# Altium PCB mini-rocket.PcbDoc (part 1 of 2)
Units mil, origin at the board's own origin, x right, y up, seen from the top; angles counter-clockwise.
Board outline 4500 x 2250 mil, 4 copper layers (Top Layer, GND, PWR, Bottom Layer), stack 63.138 mil thick; 83 components, 60 nets, 294 pads, 72 vias.
Unrouted connection lines stored in the file: 32.
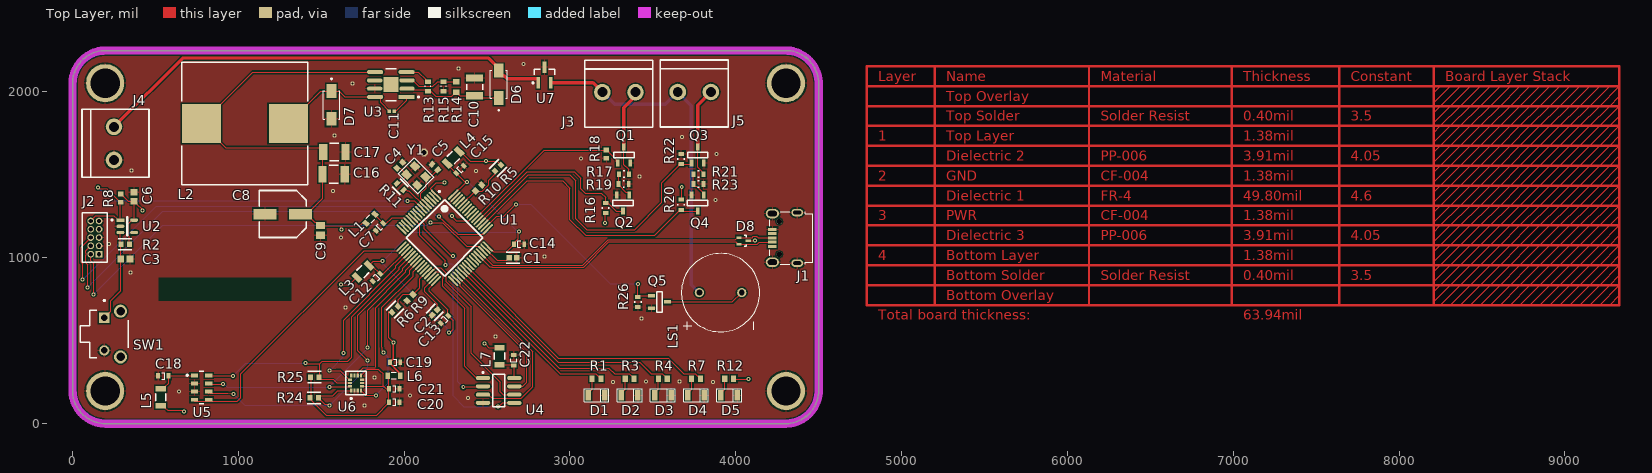
[diagram p0: Top Layer view]
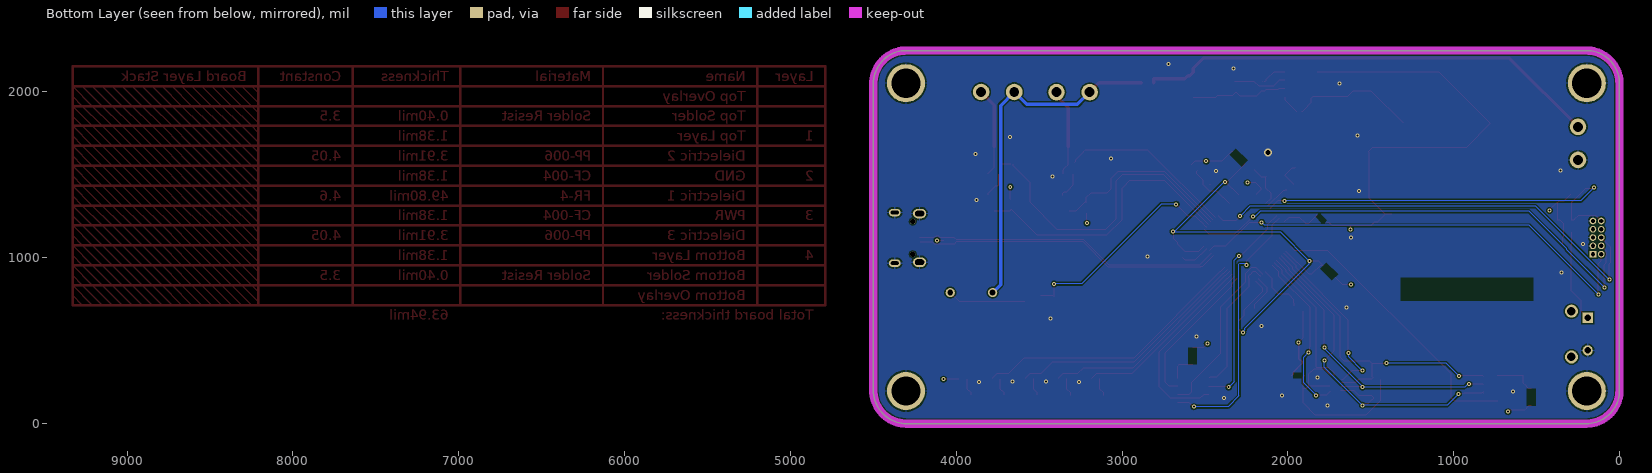
[diagram p1: Bottom Layer view, seen from below]
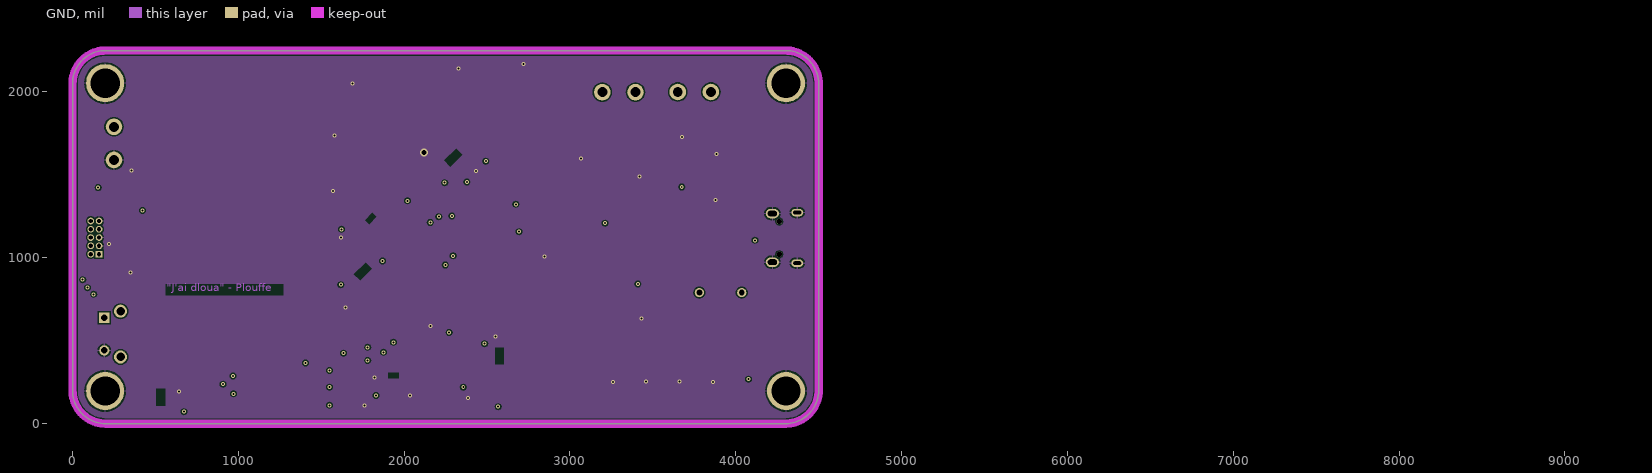
[diagram p2: GND]
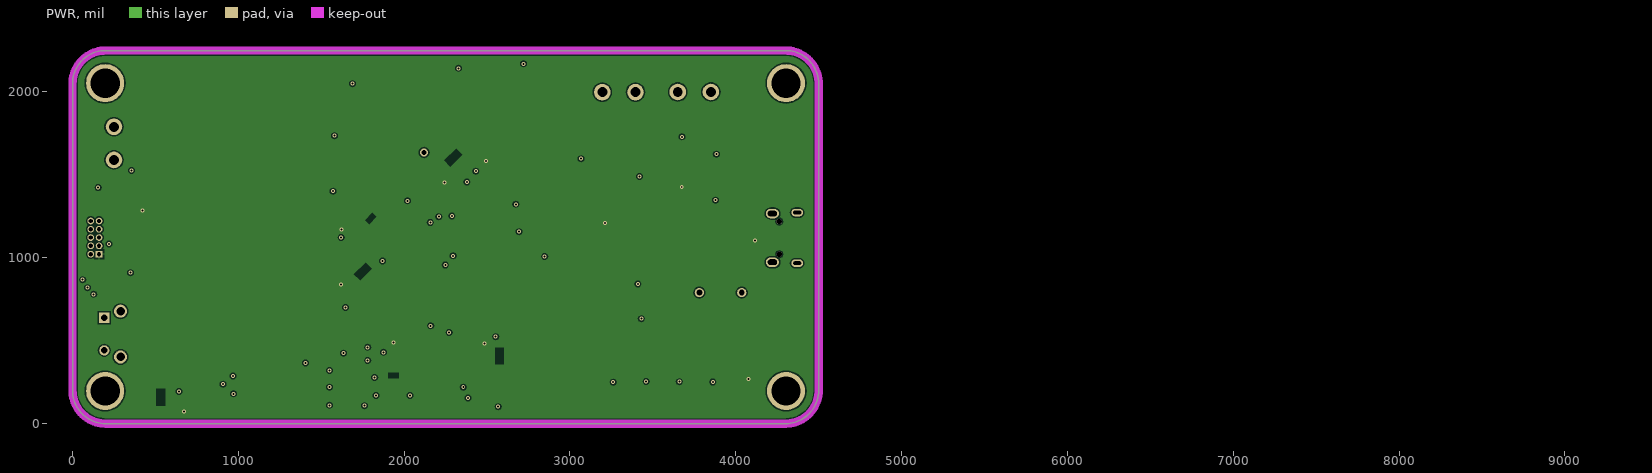
[diagram p3: PWR]
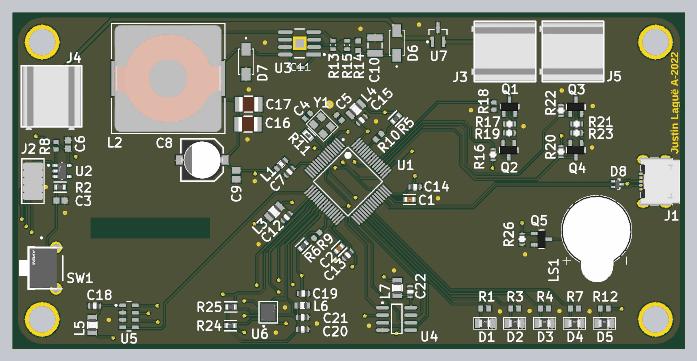
[diagram p5: 3D render of the assembled board from above, using the file's embedded part models]

## Layer stack, top to bottom
Top Solder: solder mask 0.4, Solder Resist, Dk 3.5
Top Layer: signal copper 1.378
Dielectric 2: prepreg 3.913, PP-006, Dk 4.05
GND: signal copper 1.378
Dielectric 1: dielectric 49.8, FR-4, Dk 4.6
PWR: signal copper 1.378
Dielectric 3: prepreg 3.913, PP-006, Dk 4.05
Bottom Layer: signal copper 1.378
Bottom Solder: solder mask 0.4, Solder Resist, Dk 3.5

## Board outline
0,200 ccw(c200,200) 200,0 4300,0 ccw(c4300,200) 4500,200 4500,2050 ccw(c4300,2050) 4300,2250 200,2250 ccw(c200,2050) 0,2050

## Design rules (kind name [scope] priority, off if disabled: settings)
Clearance [All] p1: gap=8 ignorepadtopadclearanceinfootprint=FALSE except(3.5: Arc-Arc Arc-Track Track-Track; 5: SMDPad-SMDPad SMDPad-THPad THPad-THPad)
DiffPairsRouting DiffPairsRouting_90 [InDifferentialPairClass('90_Ohm')] p1: maxlimit=5 minlimit=5 mostfreqgap=5 toplayer_minwidth=5.93 toplayer_maxwidth=5.93 toplayer_prefwidth=5.93 midlayer1_minwidth=3.08 midlayer1_maxwidth=3.08 midlayer1_prefwidth=3.08 midlayer2_minwidth=3.08 midlayer2_maxwidth=3.08 midlayer2_prefwidth=3.08 bottomlayer_minwidth=5.93 bottomlayer_maxwidth=5.93 bottomlayer_prefwidth=5.93 impedanceprofiledriven=TRUE impedanceprofileid={572F4013-95AF-4F84-A4E1-0ED1E80F2286} impedanceprofilevalue=90.000000 maxuncoupledlength=500
DiffPairsRouting [All] p2: maxlimit=10 minlimit=10 mostfreqgap=10 toplayer_minwidth=15 toplayer_maxwidth=15 toplayer_prefwidth=15 midlayer1_minwidth=15 midlayer1_maxwidth=15 midlayer1_prefwidth=15 midlayer2_minwidth=15 midlayer2_maxwidth=15 midlayer2_prefwidth=15 bottomlayer_minwidth=15 bottomlayer_maxwidth=15 bottomlayer_prefwidth=15 maxuncoupledlength=500
HoleSize [All] p1: absolutevalues=TRUE maxlimit=248 minlimit=8 maxpercent=80.000 minpercent=20.000
HoleToHoleClearance [All] p1: gap=20 allowstackedmicrovias=TRUE
MinimumSolderMaskSliver [All] p1: minsoldermaskwidth=8
PolygonConnect [All] p1: thpad.connectstyle=Relief thpad.reliefconductorwidth=10 thpad.reliefentries=4 thpad.polygonreliefangle="90 Angle" thpad.airgapwidth=10 smdpad.connectstyle=Relief smdpad.reliefconductorwidth=10 smdpad.reliefentries=4 smdpad.polygonreliefangle="90 Angle" smdpad.airgapwidth=10 via.connectstyle=Direct via.reliefconductorwidth=10 via.reliefentries=4 via.polygonreliefangle="90 Angle" via.airgapwidth=10
RoutingVias [All] p1: holewidth=12 width=24 viastyle="Through Hole" minholewidth=28 minwidth=50 maxholewidth=28 maxwidth=50
SilkToSilkClearance [All] p1: silktosilkclearance=5.91
SilkToSolderMaskClearance [IsPad] p1: minsilkscreentomaskgap=5.91 clearancetoexposedcopper=TRUE
SolderMaskExpansion [All] p1: expansion=1.97 istentingtop=FALSE useseparateexpansions=TRUE expansionbottom=1.97 istentingbottom=FALSE
UnRoutedNet [All] p1: checkbadconnections=TRUE
Width Width_V_Batt [InNet('VBATT')] p1: maxlimit=20 minlimit=20 preferedwidth=20
Width Width_V_Batt_Controlled [InNet('VBATT_CONTROLLED')] p2: maxlimit=20 minlimit=20 preferedwidth=20
Width Width_50 [InNetClass('50_Ohm')] p3: maxlimit=10 minlimit=3.5 preferedwidth=6.79 midlayer1_prefwidth=4.61 midlayer2_prefwidth=4.61 impedanceprofiledriven=TRUE impedanceprofileid={FD77729C-887C-43DF-8E26-8433F479A13B} impedanceprofilevalue=50.000000 minimp=50.000000 maximp=50.000000 favimp=50.000000
Width [All] p4: maxlimit=20 minlimit=3.5 preferedwidth=10
23 further rules are at their usual default settings.

## Classes and differential pairs
differential pair class 90_Ohm: D
net class 50_Ohm: BOOT0 BOOT1 HOLD INT1 INT2 OSC_IN OSC_OUT RESET_N SPI1_CS_ALTIMITER SPI1_CS_IMU SPI1_MISO SPI1_MOSI SPI1_SCK SPI2_CS SPI2_MISO SPI2_MOSI SPI2_SCK SWCLK SWDIO T_TRACESWO WP
component class U_USB_SCH: D8 J1
component class U_PCU_SCH: C7 C8 C9 C10 C11 C12 C13 C14 C15 C16 C17 D6 D7 L1 L2 L3 L4 R13 R14 R15 U3
component class U_Memory_SCH: C22 L7 U4
component class U_MCU_SCH: C1 C2 C3 C4 C5 C6 D1 D2 D3 D4 D5 R1 R2 R3 R4 R5 R6 R7 R8 R9 R10 R11 R12 SW1 U2 Y1
component class U_IMU_SCH: C19 C20 C21 L6 R24 R25 U6
component class U_Ejection_SCH: LS1 Q1 Q2 Q3 Q4 Q5 R16 R17 R18 R19 R20 R21 R22 R23 R26
component class U_Connection_SCH: J2 J3 J4 J5 U7
component class U_Altimiter_SCH: C18 L5 U5
differential pair D: +D_P -D_N

## Components (designator, comment, footprint, x,y, rotation, side; value= is the part's Value field where it differs from the comment)
C1 "LMK107B7225KA-TR" FP-0603-L_1_6_0_1-W_0_8_0-IPC_C 2656.58,1000 r0 top
C2 "LMK107B7225KA-TR" FP-0603-L_1_6_0_1-W_0_8_0-IPC_C 2184.36,670.98 r225 top
C3 "0.1 uF" MURA-0603_H_0.9_M 319.1,991.9 r180 top
C4 "2pF" CAPC1608X92X38LL15T08 1973.48,1558.01 r45 top
C5 "2pF" CAPC1608X92X38LL15T08 2185.04,1547.24 r135 top
C6 "0.1 uF" MURA-0603_H_0.9_M 370,1367.56 r270 top
C7 "GRM188R71C104KA01D" C0603 1852.27,1185.2 r45 top
C8 "UCL1C101MCL6GS" "SMD J6.3" 1267.72,1263.78 r270 top
C9 "CL21B106KOQNNNE" C0805 1496.06,1165.35 r90 top
C10 "GRM32ER71H106KA12L" C1210 2425.2,2030.51 r270 top value=10uF
C11 "0.1µF" CAPC0603X33X15ML03T05 1925.77,1884.45 r0 top
C12 "GRM188R71C104KA01D" C0603 1833.22,881.27 r225 top
C13 "GRM188R71C104KA01D" C0603 2243.41,627.67 r225 top
C14 "GRM188R71C104KA01D" C0603 2692.91,1082.68 r0 top
C15 "GRM188R71C104KA01D" C0603 2336.32,1532.02 r45 top
C16 "JMK325B7476KMHPR" FP-1210-L_3_2_0_3-W_2_5_0-MFG 1574.8,1503.94 r0 top
C17 "JMK325B7476KMHPR" FP-1210-L_3_2_0_3-W_2_5_0-MFG 1578.74,1637.8 r0 top
C18 "GRM188R71C104KA01D" C0603 548.15,287.48 r180 top
C19 "GRM188R71C104KA01D" C0603 1945,370 r180 top
C20 "GRM188R71C104KA01D" C0603 1940,130 r180 top
C21 "GRM188R60J106ME47D" C0603 1940,210 r180 top
C22 "GRM188R71C104KA01D" C0603 2660.43,382.87 r90 top
D1 "SML-LXR85GC-TR" D0805 3160,170 r0 top
D2 "SML-LXR85GC-TR" D0805 3360,170 r0 top
D3 "SML-LXR85GC-TR" D0805 3560,170 r0 top
D4 "SML-LXR85GC-TR" D0805 3760,170 r0 top
D5 "SML-LXR85GC-TR" D0805 3960,170 r0 top
D6 "SK34A" DIOM4325X250N 2570.87,2047.24 r90 top
D7 "SK34A" DIOM4325X250N 1562.01,1921.65 r270 top
D8 "RCLAMP0502BATCT" FP-SC75-MFG 4047.24,1102.36 r0 top
J1 "629105150521" 629105150521 4335,1120 r90 top
J2 "GRPB052MWCN-RC" "HEADER 50MIL 10POS MALE" 135,1122 r90 top
J3 "1716020000" 1716020000 3295,1999 r180 top
J4 "1716020000" 1716020000 250,1690 r270 top
J5 "1716020000" 1716020000 3750,2000 r180 top
L1 "MMZ1608B601C" L0603 1797.27,1235.2 r45 top
L2 "7443556350" WE-HCI-1890 1040,1810 r180 top
L3 "BLM21PG221SN1D" L0805 1751.01,917.34 r45 top
L4 "BLM21PG221SN1D" L0805 2295.84,1603.92 r225 top
L5 "BLM21PG221SN1D" L0805 532.19,158.98 r90 top
L6 "MMZ1608B601C" L0603 1938.39,290 r180 top
L7 "BLM21PG221SN1D" L0805 2574.8,407.48 r270 top
LS1 "AT-1224-TWT-12V-2-R" XDCR_AT-1224-TWT-12V-2-R 3907.95,790 r90 top
Q1 "SI2302-TP" SOT-23-3 3325,1620 r270 top
Q2 "FDV301N" SOT-23-3 3320,1330 r90 top
Q3 "SI2302-TP" SOT-23-3 3770,1620 r270 top
Q4 "FDV301N" SOT-23-3 3770,1330 r90 top
Q5 "FDV301N" SOT-23-3 3539.56,733.83 r180 top
R1 "470R" RESC1608X55X30NL15T15 3160,270 r180 top
R2 "10K" FP-ERJ3G-IPC_C 317.17,1081.9 r180 top
R3 "470R" RESC1608X55X30NL15T15 3360,270 r180 top
R4 "470R" RESC1608X55X30NL15T15 3560,270 r180 top
R5 "10K" FP-ERJ3G-IPC_C 2565.36,1541.74 r225 top
R6 "10K" FP-ERJ3G-IPC_C 1944.79,689 r45 top
R7 "470R" RESC1608X55X30NL15T15 3760,270 r180 top
R8 "2K" RESC1608X55X30LL15T15 290,1360 r90 top
R9 "470R" RESC1608X55X30NL15T15 2035,760 r45 top
R10 "470R" RESC1608X55X30NL15T15 2448.82,1420.71 r225 top
R11 "ERJ-3GEYJ222V" FP-ERJ3G-MFG 1976.38,1429.13 r135 top value=2.2kΩ
R12 "470R" RESC1608X55X30NL15T15 3960,270 r180 top
R13 "ERJU03J104V" RES_ERJU03J104V 2143.7,2033.46 r90 top value=100K
R14 "ERJ-3GEYJ393V" RESC1608X55N 2312.99,2029.53 r270 top value=39k
R15 "ERJ3EKF1022V" RES_ERJ3EKF1022V 2238.19,2033.46 r90 top value=10.2k
R16 "ERJ-3GEYJ202V" R0603 3215,1300 r90 top
R17 "ERJ-3GEYJ103V" R0603 3325,1505 r0 top
R18 "2K" RESC1608X55X30LL15T15 3220,1625.39 r90 top
R19 "ERJ-3EKF3301V" R0603 3323.7,1445 r180 top
R20 "ERJ-3GEYJ202V" R0603 3670,1320 r270 top
R21 "ERJ-3GEYJ103V" R0603 3775,1505 r0 top
R22 "ERJ-3GEYJ202V" R0603 3670,1595 r90 top
R23 "ERJ-3EKF3301V" R0603 3775,1445 r180 top
R24 "10K" FP-ERJ3G-IPC_C 1457.27,155.03 r0 top
R25 "10K" FP-ERJ3G-IPC_C 1460,280 r0 top
R26 "ERJ-3GEYJ202V" R0603 3409.56,733.83 r270 top
SW1 "MJTP1117" FP-MJTP1117-MFG 190,540 r270 top
U1 "STM32F405RGT6" STM-LQFP64_M 2244,1120 r315 top
U2 "TPS3828-33QDBVRQ1" FP-DBV0005A-IPC_C 330,1190 r0 top
U3 "ADP2303ARDZ-3.3-R7" FP-RD-8-1-IPC_A 1919.88,2045 r180 top
U4 "SST25VF512A-33-4C-SAE" MCHP-SOIC-SA8_N 2570,200 r0 top
U5 "MS560702BA03-50" TECO-MS560702BA03-50_V 778,217.59 r0 top
U6 "LSM6DSLTR" FP-LGA-14L-DM00249496-MFG 1710,245 r90 top
U7 "TLE4946-2K" INF-PG-SC59_M 2846.46,2102.36 r90 top
Y1 "490-18333-1-ND" "ECS - 4-SMD, No Lead" 2072.01,1494.92 r315 top

## Footprints (in the part's own frame and the unit in brackets; to place one, negate y for a bottom-side part, rotate by r counter-clockwise, add the part's x,y. Pads: shape width x height; smd on the part's side, far side on the other; paste and mask are expansions set on the pad)
1716020000 [mil] "CONN TERM BLOCK PCB 5.08MM 2POS  BLK"
  round 100 hole 60 mask+5: 1(-100,0) 2(100,0)
  silkscreen extent -205,-193 205,211, body extent -200,-188 224,206, height 543
629105150521 [mm] "Micro USB 2.0 SMT Type B Horizontal 5 Contacts High Current"
  rect 0.45x1.3 smd: 1(-1.3,2.9) 2(-0.65,2.9) 3(0,2.9) 4(0.65,2.9) 5(1.3,2.9)
  round 0.8 hole 0.8 unplated: MH1(-2.5,1.85) MH2(2.5,1.85)
  oval 1.15x1.8 hole 0.55 slot 1.2 at 90 deg: Shell(-3.875,-0.9) Shell(3.875,-0.9)
  oval 1.45x2 hole 0.85 slot 1.4 at 90 deg: Shell(-3.725,2.9) Shell(3.725,2.9)
  silkscreen extent -4,-3.3 4,3.3, body extent -4,-3.3 4,3.3, height 2.75
C0603 [mm] "CAPACITOR SMT, 0603"
  rect 0.6x0.85 smd: 1(-0.8,0) 2(0.8,0)
  silkscreen extent -0.23,-0.48 0.23,0.48, body extent -0.8,-0.43 0.8,0.43, height 0.86
C0805 [mm] "Chip Capacitor, Body 2.0x1.3mm, IPC High Density"
  rect 1.1x1.4 smd: 1(-0.75,0) 2(0.75,0)
  body extent -1.1,-0.72 1.1,0.72, height 1.4
C1210 [mm] "Chip Capacitor, Body 3.2x2.5mm, IPC High Density"
  rect 1.1x2.6 smd: 1(-1.35,0) 2(1.35,0)
  silkscreen extent -0.4,-1.2 0.4,1.2, body extent -1.7,-1.35 1.7,1.35, height 1.3
CAPC0603X33X15ML03T05 [mm] "Chip Capacitor, 2-Leads, Body 0.60x0.30mm, IPC Low Density"
  rect 0.56x0.52 smd: 1(-0.38,0) 2(0.38,0)
  body extent -0.31,-0.17 0.32,0.16, height 0.33
CAPC1608X92X38LL15T08 [mm] "Chip Capacitor, 2-Leads, Body 1.60x0.80mm, IPC High Density"
  rect 0.75x0.9 smd: 1(-0.625,0) 2(0.625,0)
  body extent -0.87,-0.47 0.87,0.47, height 0.92
D0805 [mm] "0805"
  rect 0.85x1.6 smd: A(-1.27,0) K(1.27,0)
  silkscreen extent -1.9,-1 1.9,1, body extent -1,-0.62 1,0.63, height 0.78
DIOM4325X250N [mm]
  rect 2.12x1.5 smd: A(2.115,0) C(-2.115,0)
  silkscreen extent -4.1,-1.28 2.16,1.28
"ECS - 4-SMD, No Lead" [mm] "4-SMD, No Lead (DFN, LCC)"
  rect 1.3x1.1 smd: 1(-1.15,-0.9) 2(1.15,-0.9) 3(1.15,0.9) 4(-1.15,0.9)
  silkscreen extent -2.12,-1.75 2.12,1.75, body extent -1.6,-1.25 1.6,1.25, height 0.8
FP-0603-L_1_6_0_1-W_0_8_0-IPC_C [mil]
  rect 33.77x31.97 smd paste+0 mask+0: 1(-22.72,0) 2(22.72,0)
  silkscreen extent -40,-33 40,33, body extent -44,-22 44,22, height 10
FP-1210-L_3_2_0_3-W_2_5_0-MFG [mm]
  rect 1.25x2.5 smd paste+0 mask+0: 1(-1.7,0) 2(1.7,0)
  silkscreen extent -0.7,-1.35 0.7,1.35, body extent -2.42,-1.45 2.42,1.45, height 0.25
FP-DBV0005A-IPC_C [mm]
  rect 1.205x0.532 smd paste+0 mask+0: 1(-1.05,0.95)
  rrect100% 1.205x0.532 smd paste+0 mask+0: 2(-1.05,0) 3(-1.05,-0.95) 4(1.05,-0.95) 5(1.05,0.95)
  silkscreen extent -2.45,-1.45 0.05,1.45, body extent -1.75,-1.55 1.75,1.55, height 0.25
FP-ERJ3G-IPC_C [mil]
  rect 29.78x33.94 smd paste+0 mask+0: 1(-25.62,0) 2(25.62,0)
  silkscreen extent -41,-34 41,34, body extent -44,-23 44,23, height 10
FP-ERJ3G-MFG [mm]
  rect 0.65x0.9 smd paste+0 mask+0: 1(-0.725,0) 2(0.725,0)
  silkscreen extent -0.88,-0.86 0.87,0.85, body extent -1.15,-0.58 1.15,0.58, height 0.25
FP-LGA-14L-DM00249496-MFG [mm]
  rect 0.575x0.35 smd paste+0 mask+0: 1(-1.162,0.75) 2(-1.162,0.25) 3(-1.162,-0.25) 4(-1.162,-0.75) 8(1.162,-0.75) 9(1.162,-0.25) 10(1.162,0.25) 11(1.162,0.75)
  rect 0.35x0.575 smd paste+0 mask+0: 5(-0.5,-0.913) 6(0,-0.913) 7(0.5,-0.913) 12(0.5,0.913) 13(0,0.913) 14(-0.5,0.913)
  silkscreen extent -2.5,-1.58 1.83,1.58, body extent -2.05,-1.8 2.05,1.8, height 0.25
FP-MJTP1117-MFG [mil]
  rect 60.65x60.65 hole 39 paste-39370.1 mask+0: 1(-98.5,1.5)
  round 60.65 hole 39 paste-39370.1 mask+0: 2(98.5,1.5)
  round 78.56 hole 51 paste-39370.1 mask+0: 3(-138,99.5) 4(138,99.5)
  silkscreen extent -208,-145 144,145, body extent -181,-148 181,148, height 10
FP-RD-8-1-IPC_A [mm]
  rect 2.474x0.622 smd paste+0 mask+0: 1(-2.416,1.905)
  rrect100% 2.358x0.622 smd paste+0 mask+0: 2(-2.474,0.635) 3(-2.474,-0.635) 6(2.474,-0.635) 7(2.474,0.635)
  rrect100% 2.474x0.622 smd paste+0 mask+0: 4(-2.416,-1.905) 5(2.416,-1.905) 8(2.416,1.905)
  rect 2.29x2.29 smd paste-1000 mask+0: 9(0,0)
  silkscreen extent -4.35,-2.45 0.8,2.45
FP-SC75-MFG [mm]
  rect 0.8x0.4 smd paste+0 mask+0: 1(-0.7,0.5) 2(-0.7,-0.5) 3(0.7,0)
  silkscreen extent 0.08,-0.85 0.43,0.85, body extent -1.2,-0.95 1.2,0.95, height 0.25
"HEADER 50MIL 10POS MALE" [mil] "Connector; Header; 5x2 Position"
  rect 40x40 hole 26: 1(-100,-25)
  round 40 hole 26: 2(-100,25) 3(-50,-25) 4(-50,25) 5(0,-25) 6(0,25) 7(50,-25) 8(50,25) 9(100,-25) 10(100,25)
  silkscreen extent -150,-75 150,75, body extent -125,-68 125,66, height 217
INF-PG-SC59_M [mm] "SOT23, 3-Leads, Body 3x1.53mm, Pitch 0.95mm, IPC Low Density"
  rect 1.8x0.55 smd: 1(-1.2,0.95) 2(-1.2,-0.95) 3(1.2,0)
  silkscreen extent -1.32,-1.55 0.87,1.9, body extent -0.87,-1.55 0.87,1.55, height 1.35
L0603 [mm] "INDUCTOR SMT, 0603"
  rect 0.7x1 smd: 1(-0.975,0) 2(0.975,0)
  Multi-Layer pour cut-out: -0.762,0.43 -0.762,-0.43 0.837,-0.43 0.838,0.254 0.838,0.43
  silkscreen extent -0.38,-0.51 0.38,0.51, body extent -0.76,-0.43 0.84,0.43, height 0.89
L0805 [mm] "INDUCTOR SMT, 0805"
  rect 0.85x1.6 smd: 1(-1.3,0) 2(1.3,0)
  Multi-Layer pour cut-out: -1.27,0.66 -1.27,-0.66 1.27,-0.66 1.27,0.66
  silkscreen extent -0.51,-0.79 0.49,0.79, body extent -1,-0.65 1,0.66, height 0.78
MCHP-SOIC-SA8_N [mm] "SOIC, 8-Leads, Body 4.9x3.9mm, Pitch 1.27mm, IPC Medium Density"
  oval 2.2x0.6 smd: 1(-2.4,1.905) 2(-2.4,0.635) 3(-2.4,-0.635) 4(-2.4,-1.905) 5(2.4,-1.905) 6(2.4,-0.635) 7(2.4,0.635) 8(2.4,1.905)
  silkscreen extent -2.52,-2.5 0.9,2.88, body extent -2,-2.5 2,2.5, height 1.75
MURA-0603_H_0.9_M [mm] "SMD, 2-Leads, Body 1.7x0.9mm, IPC Low Density"
  rect 1x1.05 smd: 1(-0.7,0) 2(0.7,0)
  body extent -0.85,-0.45 0.85,0.45, height 0.9
R0603 [mm] "RESISTOR SMT, 0603 (1608), 1/10W"
  rect 0.6x0.85 smd: 1(-0.775,0) 2(0.775,0)
  silkscreen extent -0.1,-0.48 0.1,0.48, body extent -0.8,-0.43 0.8,0.43, height 0.53
RES_ERJ3EKF1022V [mm]
  rect 0.65x0.9 smd: 1(-0.725,0) 2(0.725,0)
  silkscreen extent -0.08,-0.4 0.08,0.4
RES_ERJU03J104V [mm]
  rect 0.65x0.9 smd: 1(-0.725,0) 2(0.725,0)
  silkscreen extent -0.08,-0.4 0.08,0.4
RESC1608X55N [mm]
  rect 0.87x0.98 smd: 1(-0.8,0) 2(0.8,0)
RESC1608X55X30LL15T15 [mm] "Chip Resistor, 2-Leads, Body 1.60x0.80mm, IPC High Density"
  rect 0.7x0.85 smd: 1(-0.625,0) 2(0.625,0)
  body extent -0.87,-0.48 0.87,0.48, height 0.55
RESC1608X55X30NL15T15 [mm] "Chip Resistor, 2-Leads, Body 1.60x0.80mm, IPC Medium Density"
  rect 0.8x0.95 smd: 1(-0.675,0) 2(0.675,0)
  body extent -0.87,-0.48 0.87,0.48, height 0.55
"SMD J6.3" [mm] "6.3mm x 6.3mm"
  rect 1.6x3.5 smd: A(0,2.7) K(0,-2.7)
  silkscreen extent -3.6,-3.6 3.6,3.6, body extent -3.3,-3.5 3.3,3.5, height 8.11
SOT-23-3 [mm]
  rect 1.05x0.55 smd paste+0 mask+0: 1(1.225,-0.95) 2(1.225,0.95) 3(-1.225,0)
  silkscreen extent -0.4,-1.55 0.4,1.58, body extent -1.28,-1.5 1.27,1.5, height 1.1
STM-LQFP64_M [mm] "Thin QFP, 64-Leads, Body 10x10mm, Pitch 0.5mm, IPC Low Density"
  oval 2.1x0.3 smd: 1(-5.6,3.75) 2(-5.6,3.25) 3(-5.6,2.75) 4(-5.6,2.25) 5(-5.6,1.75) 6(-5.6,1.25) 7(-5.6,0.75) 8(-5.6,0.25) 9(-5.6,-0.25) 10(-5.6,-0.75) 11(-5.6,-1.25) 12(-5.6,-1.75) 13(-5.6,-2.25) 14(-5.6,-2.75) 15(-5.6,-3.25) 16(-5.6,-3.75) 33(5.6,-3.75) 34(5.6,-3.25) 35(5.6,-2.75) 36(5.6,-2.25) 37(5.6,-1.75) 38(5.6,-1.25) 39(5.6,-0.75) 40(5.6,-0.25) 41(5.6,0.25) 42(5.6,0.75) 43(5.6,1.25) 44(5.6,1.75) 45(5.6,2.25) 46(5.6,2.75) 47(5.6,3.25) 48(5.6,3.75)
  oval 0.3x2.1 smd: 17(-3.75,-5.6) 18(-3.25,-5.6) 19(-2.75,-5.6) 20(-2.25,-5.6) 21(-1.75,-5.6) 22(-1.25,-5.6) 23(-0.75,-5.6) 24(-0.25,-5.6) 25(0.25,-5.6) 26(0.75,-5.6) 27(1.25,-5.6) 28(1.75,-5.6) 29(2.25,-5.6) 30(2.75,-5.6) 31(3.25,-5.6) 32(3.75,-5.6) 49(3.75,5.6) 50(3.25,5.6) 51(2.75,5.6) 52(2.25,5.6) 53(1.75,5.6) 54(1.25,5.6) 55(0.75,5.6) 56(0.25,5.6) 57(-0.25,5.6) 58(-0.75,5.6) 59(-1.25,5.6) 60(-1.75,5.6) 61(-2.25,5.6) 62(-2.75,5.6) 63(-3.25,5.6) 64(-3.75,5.6)
  silkscreen extent -5.72,-4.15 4.15,4.57, body extent -5,-5 5,5, height 1.6
TECO-MS560702BA03-50_V [mm] "SMD, 8-Leads, Body 3x5mm, Pitch 1.25mm"
  rect 1.1x0.6 smd: 1(-1.1,1.875) 2(-1.1,0.625) 3(-1.1,-0.625) 4(-1.1,-1.875) 5(1.1,-1.875) 6(1.1,-0.625) 7(1.1,0.625) 8(1.1,1.875)
  silkscreen extent -2.32,-2.5 0.32,2.5, body extent -1.5,-2.5 1.5,2.5, height 1
WE-HCI-1890 [mm] "Inductor, 2-Leads, Body 18.3 x 18.2 mm"
  rect 6x6 smd: 1(-6.65,0) 2(6.65,0)
  silkscreen extent -9.65,-9.35 9.65,9.35, body extent -9.15,-9.1 9.15,9.1, height 8.85
XDCR_AT-1224-TWT-12V-2-R [mm]
  round 1.408 hole 0.9: N(0,-3.25) P(0,3.25)
  silkscreen extent -6,-6 6,6, body extent -8.74,-5.99 6,6, height 9.07

## Part data
C1: library part CMP-14477-000474-2, "CAP CER 2.2UF 10V X7R 0603", Capacitance=2.2uF, Case/Package=0603, Dielectric=X7R, Max Operating Temperature=125°C, Min Operating Temperature=-55°C, Tolerance=10%, Voltage Rating=10V, Halogen Free="Halogen Free", Length=0.063inch, Mount="Surface Mount", Packaging="Tape and Reel", RoHS Compliant=Yes, Termination=Wraparound, Thickness=0.035inch, Voltage Rating (DC)=10V, Width=0.031inch
C2: library part CMP-14477-000474-2, "None", Capacitance=2.2uF, Case/Package=0603, Dielectric=X7R, Max Operating Temperature=125°C, Min Operating Temperature=-55°C, Tolerance=10%, Voltage Rating=10V, Halogen Free="Halogen Free", Length=0.063inch, Mount="Surface Mount", Packaging="Tape and Reel", RoHS Compliant=Yes, Termination=Wraparound, Thickness=0.035inch, Voltage Rating (DC)=10V, Width=0.031inch
C3: library part CMP-2000-05253-1, "CAP, Ceramic, 0.1 uF, 10%, 16 V, 0603, RoHS, Tape and Reel", Capacitance=0.1uF, Capacitance - nF=100nF, Capacitance - pF=100000pF, Case Code - in=0603, Case Code - mm=1608, Case Height=0.8mm, Case Length=1.6mm, Dielectric=X7R, Manufacturer=Murata, Maximum Operating Temperature=+125C, Minimum Operating Temperature=-55C, Operating Temperature Range=-55Cto+125C, Package / Case=0603(1608metric), Temperature Coefficient / Code=+/-15%, Tolerance=10%, Voltage Rating=16V, Brand=MurataElectronics, Case Width=0.8mm, Datasheet URL=https://datasheet.ciiva.com/29202/451467-da-01-en-vs-kondensator-0603-29202287.pdf, Datasheet Version=Dec-10, Dimensions=0.8mmWx1.6mmLx0.8mmH, Factory Pack Quantity=4000, Manufacturer URL=http://www.murata.com/, Packaging=Reel, Product=GeneralTypeMLCCs, Product Category=MultilayerCeramicCapacitorsMLCC-SMD/SMT, RoHS=Details, Series=GRM, Termination Style=SMD/SMT, Type=GeneralPurposeMLCC, Voltage Rating DC=16V
C4 C5: library part CMP-2006-01521-1, "VJ0603D471KXXAJ CAP CER 2PF 50V C0G/NP0 0603", Manufacturer=Vitramon, Part Number=VJ0603D471KXXAJ
C6: library part CMP-2000-05253-1, "CAP, Ceramic, 0.1 uF, 10%, 16 V, 0603, RoHS, Tape and ReelGRM188R71C104KA01D", Capacitance=0.1uF, Capacitance - nF=100nF, Capacitance - pF=100000pF, Case Code - in=0603, Case Code - mm=1608, Case Height=0.8mm, Case Length=1.6mm, Dielectric=X7R, Manufacturer=Murata, Maximum Operating Temperature=+125C, Minimum Operating Temperature=-55C, Operating Temperature Range=-55Cto+125C, Package / Case=0603(1608metric), Temperature Coefficient / Code=+/-15%, Tolerance=10%, Voltage Rating=16V, Brand=MurataElectronics, Case Width=0.8mm, Datasheet URL=https://datasheet.ciiva.com/29202/451467-da-01-en-vs-kondensator-0603-29202287.pdf, Datasheet Version=Dec-10, Dimensions=0.8mmWx1.6mmLx0.8mmH, Factory Pack Quantity=4000, Manufacturer URL=http://www.murata.com/, Packaging=Reel, Product=GeneralTypeMLCCs, Product Category=MultilayerCeramicCapacitorsMLCC-SMD/SMT, RoHS=Details, Series=GRM, Termination Style=SMD/SMT, Type=GeneralPurposeMLCC, Voltage Rating DC=16V
C7 C12 C13 C14 C15 C18 C19 C20 C22: "CAP CER 0.1UF 16V 10% X7R 0603", Capacitance=0.1µF, Operating Temperature="-55°C ~ 125°C", Supplier Part Number 1=490-1532-1-ND, Temperature Coefficient=X7R, Tolerance=±10%, Voltage - Rated=16V, Applications="General Purpose", ComponentLink1Description=Datasheet, ComponentLink1URL=http://search.murata.co.jp/Ceramy/image/img/A01X/G101/ENG/GRM188R71C104KA01-01.pdf, ComponentLink2Description=Photo, ComponentLink2URL=http://media.digikey.com/photos/Murata%20Photos/0603%20Murata%20MLCC%20Caps.jpg, Pricing 1="1=0.13 (USD)", Supplier 1=Digi-Key
C8: "CAP ALUM 100UF 16V 20% SMD", Capacitance=100µF, Operating Temperature="-55°C ~ 105°C", Ripple Current=600mA, Supplier Part Number 1=493-3920-1-ND, Tolerance=±20%, Voltage Rating=16V, ComponentLink1Description=Datasheet, ComponentLink1URL=http://nichicon-us.com/english/products/pdfs/e-cl.pdf, ComponentLink2Description=Photo, Impedance="160 mOhm", Pricing 1="1=0.45, 10=0.306, 100=0.144, 250=0.1026, 500=0.0783, 1000=0.054 (USD)", Supplier 1=Digi-Key
C9: "CAP CER 10UF 16V 10% X7R 0805", Capacitance=10µF, Operating Temperature="-55°C ~ 125°C", Supplier Part Number 1=1276-2872-1-ND, Temperature Coefficient=X7R, Tolerance=±10%, Voltage - Rated=16V, Applications="General Purpose", ComponentLink1Description=Datasheet, ComponentLink1URL=http://www.samsungsem.com/kr/front/downloadcms.do?path=/kr/support/product-search/mlcc/__icsFiles/afieldfile/2014/11/05&fileName=C_CL21B106KOQNNNE.pdf, ComponentLink2Description=Photo, ComponentLink2URL=http://media.digikey.com/Renders/Samsung%20Electro-Mechanics%20America/CL%20Series%201206(3216%20Metric)%2014.jpg, Pricing 1="1=0.39 (USD)", Supplier 1=Digi-Key
C10: library part CMP-2000-06106-2, "CAP CER 10UF 16V X7R 0805", Capacitance=10uF, Manufacturer="Samsung Electro-Mechanics America, Inc", Manufacturer Part Number=CL21B106KOQNNNE, Temperature="-55°C to +125°C", Temperature Characteristic=X7R, Temperature Coefficient=15%, Temperature Range High=+125°C, Temperature Range Low=-55°C, Tolerance=10%, Voltage Rating=16V, Automotive=No, Category=Cap, ComponentLink2Description=Datasheet, ComponentLink2URL=http://www.samsungsem.com/servlet/FileDownload?path=productsearch&sname=CL21B106KOQNNNE.pdf&oname=CL21B106KOQNNNE.pdf, Device Class L1="Passive Components", Device Class L2=Capacitors, Device Class L3="Ceramic Capacitors", Digikey Description="CAP CER 10UF 16V X7R 0805", Height=1.4mm, Ipc Land Pattern Name=CAPC200125X125, Lead Free=Yes, Material=Ceramic, Octopart=https://octopart.com/cl21b106koqnnne-samsung-19832289, Package=CL21B106KOQNNNE, RoHS=TRUE
C11: library part CMP-2010-01734-1, "MC000311", Manufacturer=Multicomp, Part Number=MC000311
C16: library part CMP-14477-003362-2, "CAP CER 47UF 6.3V X7R 1210", Capacitance=47uF, Case Code (Imperial)=1210, Case Code (Metric)=3225, Max Operating Temperature=125°C, Min Operating Temperature=-55°C, Ratings=AEC-Q200, Tolerance=10%, Voltage Rating=6.3V, Case/Package=1210, Mount="Surface Mount", Packaging="Cut Tape", RoHS Compliant=Yes
C17: library part CMP-14477-003362-2, "None", Capacitance=47uF, Case Code (Imperial)=1210, Case Code (Metric)=3225, Max Operating Temperature=125°C, Min Operating Temperature=-55°C, Ratings=AEC-Q200, Tolerance=10%, Voltage Rating=6.3V, Case/Package=1210, Mount="Surface Mount", Packaging="Cut Tape", RoHS Compliant=Yes
C21: "CAP CER 10UF 6.3V X5R 0603", Capacitance=10µF, Manufacturer="Murata Electronics North America", Operating Temperature="-55°C ~ 85°C", Package / Case="0603 (1608 Metric)", Ratings=-, Supplier Part Number 1=490-3896-1-ND, Temperature Coefficient=X5R, Tolerance=±20%, Voltage - Rated=6.3V, Applications="General Purpose", Category=Capacitors, ComponentLink1Description=http://www.murata.com/~/media/webrenewal/support/library/catalog/products/capacitor/mlcc/c02e.ashx, ComponentLink1URL=http://www.murata.com/~/media/webrenewal/support/library/catalog/products/capacitor/mlcc/c02e.ashx, Features=-, Height - Seated (Max)=-, Lead Spacing=-, Lead Style=-, Manufacturer Part Number=GRM188R60J106ME47D, Mounting Type="Surface Mount, MLCC", Packaging="Cut Tape (CT)", Pricing 1="1=0.28, 10=0.186, 50=0.1124, 100=0.0944, 250=0.0764, 500=0.0674, 1000=0.0573 (CAD)", RoHS="RoHS Compliant", Size / Dimension="0.063\" L x 0.031\" W (1.60mm x 0.80mm)", Stock 1=3077943, Supplier 1=Digi-Key, Thickness (Max)="0.035\" (0.90mm)"
D1 D2 D3 D4 D5: "LED RA 565NM GREEN WTR CLR SMD 0805", Color=Green, Current - Test=20mA, Lens Color=Colorless, Millicandela Rating=12mcd, Supplier Part Number 1=67-1557-1-ND, Voltage - DC Reverse (Vr) (Max)=5V, Voltage - Forward (Vf) (Typ)=2.2V, ComponentLink1Description=Datasheet, ComponentLink1URL=http://www.lumex.com/specs/SML-LXR85GC-TR.pdf, ComponentLink2Description=Photo, ComponentLink2URL=http://media.digikey.com/photos/Lumex%20Photos/Fig%2012%20T052%201546.jpg, Lens Style/Size="Rectangle with Domed Top", Lens Transparency=Clear, Supplier 1=Digi-Key, Viewing Angle=130°, Wavelength - Peak=565nm
D6 D7: Package=None, Availability=Unavailable, MP=SK34A, Price=None
D8: library part CMP-56445-000003-1, "TVS DIODE 5VWM 25VC SC75"
J1: "WR-Micro USB 2.0 Type B, Receptacle, Horizontal, SMT, with Pegs", Manufacturer="Wurth Elektronik", Operating Temperature Max=85°C, Operating Temperature Min=-40°C, Rated Current=3A, Supplier Part Number 1=1225099, Working Voltage=30VAC, Application="Micro USB 2.0", Category="Input/Output Connectors", ComponentLink1Description="Website Link", ComponentLink1URL=https://www.we-online.com/redexpert/article/629105150521?ad, ComponentLink2Description="Datasheet Link", ComponentLink2URL=https://www.we-online.com/redexpert/spec/629105150521?ad, Gender=Receptacle, Interface Type="Type B", Manufacturer Part Number=629105150521, Match Code=WR-USB, Mount="Surface Mount", Number of Pins=5, Number of Ports=1, Orientation=Horizontal, Packaging="Tape and Reel", Supplier 1=RSComponents
J2: "CONN HEADER R/A 10POS 1.27MM", Supplier Part Number 1=S9017E-05-ND, ComponentLink1URL=http://media.digikey.com/photos/FCI%20Photos/67996-114HLF.JPG, ComponentLink2Description=photo, Supplier 1=Digi-Key
J3 J4 J5: "CONN TERM BLOCK PCB 5.08MM 2POS", Color=Black, Current=15A, Operating Temperature="-50°C ~ 120°C", Supplier Part Number 1=281-1435-ND, Voltage=300V, ComponentLink1Description=Datasheet, ComponentLink1URL=http://media.digikey.com/pdf/Data%20Sheets/Weidmuller%20PDFs/Printed%20Circuit%20Board%20Terminals.pdf#page=14, ComponentLink2Description=Photo, ComponentLink2URL=http://media.digikey.com/photos/Weidmuller/1716020000.jpg, ComponentLink3Description="PCB Layout", ComponentLink3URL=http://media.digikey.com/pdf/Catalog%20Drawings/Connectors/LM%205.0-90-PCB%20LAY-v1.jpg, Contact Material - Plating="Copper Alloy - Tin Plated", Features="Interlocking (Side)", Housing Material="Thermoplastic, Wemid", Mating Orientation="Horizontal with Board", Mounting Type="Through Hole", Number of Levels=1, Pitch="0.200\" (5.08mm)", Positions Per Level=2, Pricing 1="1=1.27, 10=1.137, 100=1.0105, 500=0.88418, 1000=0.75786 (USD)", Screw Thread=M2.5, Supplier 1=Digi-Key, Torque - Screw="0.4-0.5 Nm (3.5-4.4 Lb-In)", Wire Gauge="14-24 AWG", Wire Termination="Screw - Clamping Yoke, Tension Sleeve"
L1 L6: "FERRITE CHIP 600 OHM 500MA 0603", Current Rating=500mA, DC Resistance (DCR)="400 mOhm Max", Impedance @ Frequency="600 Ohm @ 100MHz", Supplier Part Number 1=445-2166-1-ND, ComponentLink1Description=datasheet, ComponentLink1URL=http://product.tdk.com/en/catalog/datasheets/beads_commercial_signal_mmz_en.pdf, ComponentLink2Description=photo, ComponentLink2URL=http://media.digikey.com/Renders/TDK%20Renders/MMZ1608xxxxxTAH0.jpg, Filter Type="Differential Mode - Single", Supplier 1=Digi-Key
L2: library part CMP-0226-00011-1, "SMD Flat Wire High Current Inductor WE-HCI, L=3.50 µH", Inductance="3.50 µH", ComponentLink1Description="Manufacturer Link", ComponentLink1URL=http://www.we-online.com, ComponentLink2Description=Datasheet, ComponentLink2URL=http://www.we-online.de/katalog/media/pdf/7443556350.pdf, DatasheetVersion="ver 3, Nov-2009", PackageDescription="Inductor, 2-Leads, Body 18.3 x 18.2 mm", PackageReference=WE-HCI-1890, PackageVersion=2009
L3 L4 L5 L7: "FERRITE CHIP 220 OHM 0805", Current Rating=2A, DC Resistance (DCR)="45 mOhm Max", Impedance @ Frequency="220 Ohm @ 100MHz", Supplier Part Number 1=490-1054-1-ND, ComponentLink1Description=datasheet, ComponentLink1URL=http://search.murata.co.jp/Ceramy/image/img/PDF/ENG/L0110S0100BLM21P.pdf, ComponentLink2Description=photo, ComponentLink2URL=http://media.digikey.com/photos/Murata%20Photos/BLM21%20SERIES%200805.jpg, Filter Type="Differential Mode - Single", Supplier 1=Digi-Key
LS1: "AUDIO TRANSDUCER 12 VP-P 85 DB 2400 HZ", Package="PUI Audio,", Availability="In Stock", Check_prices=https://www.snapeda.com/parts/AT-1224-TWT-12V-2-R/PUI%20Audio,%20Inc./view-part/3215877/?ref=eda, MF="PUI Audio,", MP=AT-1224-TWT-12V-2-R, Price=None, Purchase-URL=https://pricing.snapeda.com/search/part/AT-1224-TWT-12V-2-R/?ref=eda, SnapEDA_Link=https://www.snapeda.com/parts/AT-1224-TWT-12V-2-R/PUI%20Audio,%20Inc./view-part/3215877/?ref=snap
Q1 Q3: library part FDV301N, "MOSFET N-CH 20V 3A SOT-23", Current - Continuous Drain (Id) @ 25°C="220mA (Ta)", Drain to Source Voltage (Vdss)=25V, Input Capacitance (Ciss) @ Vds="9.5pF @ 10V", Manufacturer="Fairchild Semiconductor", Power - Max=350mW, Supplier Part Number 1=FDV301NCT-ND, ComponentLink1Description=Datasheet, ComponentLink1URL=https://www.fairchildsemi.com/datasheets/FD/FDV301N.pdf, ComponentLink2Description=Photo, ComponentLink2URL=http://media.digikey.com/Renders/~~Pkg.Case%20or%20Series/SOT-23-3%20PKG.jpg, FET Feature="Logic Level Gate", FET Type="MOSFET N-Channel, Metal Oxide", Gate Charge (Qg) @ Vgs="0.7nC @ 4.5V", Pricing 1="1=0.31 (CAN)", Rds On (Max) @ Id, Vgs="4 Ohm @ 400mA, 4.5V", Supplier 1=Digi-Key, Vgs(th) (Max) @ Id="1.06V @ 250µA"
Q2 Q4 Q5: "MOSFET N-CH 25V 220MA SOT-23", Current - Continuous Drain (Id) @ 25°C="220mA (Ta)", Drain to Source Voltage (Vdss)=25V, Input Capacitance (Ciss) @ Vds="9.5pF @ 10V", Manufacturer="Fairchild Semiconductor", Power - Max=350mW, Supplier Part Number 1=FDV301NCT-ND, ComponentLink1Description=Datasheet, ComponentLink1URL=https://www.fairchildsemi.com/datasheets/FD/FDV301N.pdf, ComponentLink2Description=Photo, ComponentLink2URL=http://media.digikey.com/Renders/~~Pkg.Case%20or%20Series/SOT-23-3%20PKG.jpg, FET Feature="Logic Level Gate", FET Type="MOSFET N-Channel, Metal Oxide", Gate Charge (Qg) @ Vgs="0.7nC @ 4.5V", Pricing 1="1=0.31 (CAN)", Rds On (Max) @ Id, Vgs="4 Ohm @ 400mA, 4.5V", Supplier 1=Digi-Key, Vgs(th) (Max) @ Id="1.06V @ 250µA"
R1: library part CMP-2000-00795-1, "470 Ohm ERJ-3GEYJ471V", Manufacturer=Panasonic, Part Number=ERJ-3GEYJ471V
R2 R24 R25: library part CMP-2000-00704-2, "RES SMD 10K OHM 5% 1/10W 0603", Case Code (Imperial)=0603, Case Code (Metric)=1608, Max Operating Temperature=155°C, Max Power Dissipation=100mW, Min Operating Temperature=-55°C, Package Quantity=1, Resistance=10kR, Resistance Tolerance=5%, Resistor Type="Thick Film", Temperature Coefficient=200ppm/°C, Voltage Rating=75V, Voltage Rating (DC)=50V, Case/Package=0603, Construction=Rectangular, Contact Plating=Tin, Depth=0.8mm, Features="Automotive AEC-Q200", Height=0.45mm, Lead Free="Lead Free", Length=1.6mm, Military Standard=Not, Mount="Surface Mount", Number of Terminations=2, Packaging="Tape and Reel", Power Rating=100mW, REACH SVHC="No SVHC", RoHS Compliant=Yes, Series=ERJ, Technology="THICK FILM", Termination=SMD/SMT, Tolerance=5%, Weight=7.1E-05oz, Width=0.8mm, Working Voltage=75V
R3 R4 R7 R9 R10 R12: library part CMP-2000-00795-1, "ERJ-3GEYJ471V", Manufacturer=Panasonic, Part Number=ERJ-3GEYJ471V
R5 R6: library part CMP-2000-00704-2, "RES SMD 10K OHM 5% 1/10W 0603 ERJ-3GEYJ103V", Case Code (Imperial)=0603, Case Code (Metric)=1608, Max Operating Temperature=155°C, Max Power Dissipation=100mW, Min Operating Temperature=-55°C, Package Quantity=1, Resistance=10kR, Resistance Tolerance=5%, Resistor Type="Thick Film", Temperature Coefficient=200ppm/°C, Voltage Rating=75V, Voltage Rating (DC)=50V, Case/Package=0603, Construction=Rectangular, Contact Plating=Tin, Depth=0.8mm, Features="Automotive AEC-Q200", Height=0.45mm, Lead Free="Lead Free", Length=1.6mm, Military Standard=Not, Mount="Surface Mount", Number of Terminations=2, Packaging="Tape and Reel", Power Rating=100mW, REACH SVHC="No SVHC", RoHS Compliant=Yes, Series=ERJ, Technology="THICK FILM", Termination=SMD/SMT, Tolerance=5%, Weight=7.1E-05oz, Width=0.8mm, Working Voltage=75V
R8: library part CMP-2000-00741-1, "ERJ-3GEYJ202V", Manufacturer=Panasonic, Part Number=ERJ-3GEYJ202V
R11: library part CMP-2000-00747-2, "RES SMD 2.2K OHM 5% 1/10W 0603", Manufacturer=Panasonic, Package=ERJ3G, Power Rating=0.1W, Resistance=2.2kΩ, Temperature="-55°C to +155°C", Temperature Coefficient=200ppm/°C, Temperature Range High=+155°C, Temperature Range Low=-55°C, Tolerance=5%, Voltage Rating=75V, Automotive=Yes, Automotive Grade="Grade 0", Category=Res, ComponentLink2Description=Datasheet, ComponentLink2URL=https://industrial.panasonic.com/cdbs/www-data/pdf/RDA0000/AOA0000C301.pdf, Composition="Thick Film", Device Class L1="Passive Components", Device Class L2=Resistors, Device Class L3="Chip SMD Resistors", Digikey Description="RES SMD 2.2K OHM 5% 1/10W 0603", Footprint Url=https://industrial.panasonic.com/cdbs/www-data/pdf/RDA0000/DMA0000COL17.pdf, Height=0.55mm, Lead Free=Yes, Manufacturer Part Number=ERJ-3GEYJ222V, Mouser Description="Thick Film Resistors - SMD 0603 2.2Kohms 5% AEC-Q200", Octopart=https://octopart.com/erj-3geyj222v-panasonic-55422038, RoHS=TRUE, Series=ERJ
R13: "RES 100K OHM 5% 1/10W 0603 SMD", Package=None, Availability=Unavailable, MP=ERJU03J104V, Price=None
R14: "Res Thick Film 0603 39K Ohm 5% 0.1W(1/10W) ?200ppm/?C Molded SMD Automotive T/R", Package=None, Availability=Unavailable, MP=ERJ-3GEYJ393V, Price=None
R15: "RES SMD 10.2K OHM 1% 1/10W 0603", Package=None, Availability=Unavailable, MP=ERJ3EKF1022V, Price=None
R16 R20 R22 R26: "RES SMD 2K OHM 5% 1/10W 0603", Operating Temperature="-55°C ~ 155°C", Power (Watts)="0.1W, 1/10W", Resistance (Ohms)=2k, Supplier Part Number 1=P2.0KGCT-ND, Temperature Coefficient=±200ppm/°C, Tolerance=±5%, ComponentLink1Description=Datasheet, ComponentLink1URL=http://industrial.panasonic.com/www-cgi/jvcr13pz.cgi?E+PZ+3+AOA0001+ERJ3GEYJ223V+7+WW, ComponentLink2Description=Photo, ComponentLink2URL=http://media.digikey.com/photos/Panasonic%20Photos/10-0603%20Resistor.jpg, Composition="Thick Film", Supplier 1=Digi-Key
R17 R21: "RES SMD 10K OHM 5% 1/10W 0603", Operating Temperature="-55°C ~ 155°C", Power (Watts)="0.1W, 1/10W", Resistance (Ohms)=10k, Supplier Part Number 1=P10KGCT-ND, Temperature Coefficient=±200ppm/°C, Tolerance=±5%, ComponentLink1Description=Datasheet, ComponentLink1URL=http://industrial.panasonic.com/www-cgi/jvcr13pz.cgi?E+PZ+3+AOA0001+ERJ3GEYJ223V+7+WW, ComponentLink2Description=Photo, ComponentLink2URL=http://media.digikey.com/photos/Panasonic%20Photos/10-0603%20Resistor.jpg, Composition="Thick Film", Supplier 1=Digi-Key
R18: library part CMP-2000-00741-1, "RES SMD 2K OHM 5% 1/10W 0603", Manufacturer=Panasonic, Part Number=ERJ-3GEYJ202V
R19 R23: "RES SMD 3.3K OHM 1% 1/10W 0603", Operating Temperature="-55°C ~ 155°C", Power (Watts)=0.1W, Resistance (Ohms)=3k3, Supplier Part Number 1=P3.30KHCT-ND, Temperature Coefficient=±100ppm/°C, Tolerance=±1%, ComponentLink1Description=Datasheet, ComponentLink1URL=http://industrial.panasonic.com/www-cgi/jvcr13pz.cgi?E+PZ+3+AOA0002+ERJ3EKF51R1V+7+WW, ComponentLink2Description=Photo, ComponentLink2URL=http://media.digikey.com/Renders/Panasonic%20Renders/ERJ-1206%20Pkg.jpg, Composition="Thick Film", Supplier 1=Digi-Key
SW1: library part CMP-47024-000001-1, "SWITCH TACTILE SPST-NO 0.05A 12V", Contact Current Rating=50mA, Contact Resistance=500mΩ, Manufacturer="Apem Inc.", Operating Force=160gf, Package=0, Temperature="-20°C to +70°C", Temperature Range High=+70°C, Temperature Range Low=-20°C, Voltage Rating DC=12V, Automotive=No, Category=Switch, ComponentLink2Description=Datasheet, ComponentLink2URL=https://www.apem.com/int/index.php?controller=attachment&id_attachment=876, Device Class L1=Electromechanical, Device Class L2=Switches, Device Class L3="Tactile Switches", Digikey Description="SWITCH TACTILE SPST-NO 0.05A 12V", Electromechanical Life=100000Cycles, Height=0.169inch, Lead Free=Yes, Manufacturer Part Number=MJTP1117, Mount="Through Hole", Mouser Description="Switch Tactile N.O. SPST Rectangular Button PC Pins 0.05A 12VDC 1.57N Thru-Hole Bulk", Octopart=https://octopart.com/mjtp1117-apem-6499265, RoHS=TRUE, Throw Configuration=SPST-NO
U1: library part CMP-0243-00019-3, "ARM Cortex-M4 32-bit MCU+FPU, 210 DMIPS, 1024 kB Flash, 192 kB Internal RAM, 51 I/Os, 64-pin LQFP, -40 to 85 degC, Tray", I/Os (High Current)=51, Manufacturer=STMicroelectronics, Operating Frequency(F) (Processor speed) (MHz)=168, Supply Voltage(Vcc) max (V)=3.6, Supply Voltage(Vcc) min (V)=1.8, ComponentLink1Description="Manufacturer URL", ComponentLink1URL=http://www.st.com/web/en/home.html, ComponentLink2Description=Datasheet, ComponentLink2URL=http://www.st.com/st-web-ui/static/active/en/resource/technical/document/datasheet/DM00037051.pdf, ComponentLink3Description="Package Specification", ComponentLink3URL=http://www.st.com/st-web-ui/static/active/en/resource/technical/document/datasheet/DM00037051.pdf, Core="ARM Cortex-M4", D/A Converter=2x12-bit, DatasheetVersion="Rev. 4", FLASH Size (Prog) (kB)=1024, Internal RAM Size (kB)=192, Mounting Technology="Surface Mount", PackageDescription="64-Pin Low Profile Quad Flat Package, 10 x 10 mm Body, 0.5 mm Pitch", PackageReference=LQFP64, PackageVersion="Rev. 4, 06/2013", Packing=Tray, PartNumber=STM32F405RGT6
U2: library part CMP-04919-000035-1, "IC SUPERVISOR 1 CHANNEL SOT23-5", Case/Package=SOT-23-5, Max Operating Temperature=125°C, Max Power Dissipation=437mW, Max Reset Threshold Voltage=3V, Max Supply Current=25uA, Max Supply Voltage=5.5V, Min Operating Temperature=-40°C, Min Reset Threshold Voltage=2.84V, Min Supply Voltage=1.1V, Number of Voltages Monitored=1, Operating Supply Current=15uA, Threshold Voltage=2.93V, Lead Free="Lead Free", Mount="Surface Mount", Nominal Supply Current=25uA, Number of Elements=1, Number of Pins=5, Overvoltage Threshold=3V, Package Quantity=1, Packaging="Tape and Reel", Power Dissipation=437mW, Quiescent Current=15uA, Radiation Hardening=No, REACH SVHC="No SVHC", Reset="Active Low", Reset Timeout=120ms, RoHS Compliant=Yes, Series=-, Supply Current=25uA, Type="Simple Reset/Power-On Reset", Undervoltage Threshold=2.93V, Watchdog Timer=Yes
U3: library part CMP-09139-000634-1, "IC REG BUCK 3.3V 3A 8SOIC", Case/Package=SOIC, Max Input Voltage=20V, Max Operating Temperature=125°C, Max Output Current=3A, Max Output Voltage=16V, Min Input Voltage=3V, Min Operating Temperature=-40°C, Min Output Voltage=800mV, Nominal Output Voltage=3.3V, Nominal Supply Current=950uA, Switching Frequency=700kHz, Contact Plating=Tin, Fall Time=280ns, Height=1.75mm, Lead Free="Contains Lead", Length=4.9mm, Max Duty Cycle=50%, Mount="Surface Mount", Number of Outputs=1, Number of Pins=8, Operating Supply Current=950uA, Operating Supply Voltage=20V, Output Configuration=Positive, Output Current=3A, Output Type=Fixed, Output Voltage=3.3V, Packaging="Tape and Reel", Radiation Hardening=No, Rise Time=170ns, RoHS Compliant=Yes, Series=-, Synchronous Rectifier=No, Weight=0.019048oz, Width=4mm
U4: library part CMP-0378-00091-1, "512 Kbit SPI Serial Flash, 2.7 to 3.6 V, 33 MHz, 0 to 70 degC, 8-pin SOIC (SA8), Tube", Manufacturer=Microchip, Code_JEDEC=MS-012, ComponentLink1Description="Manufacturer URL", ComponentLink1URL=http://www.microchip.com, ComponentLink2Description=Datasheet, ComponentLink2URL=http://ww1.microchip.com/downloads/en/DeviceDoc/25090A.pdf, ComponentLink3Description="Package Specification", ComponentLink3URL=http://ww1.microchip.com/downloads/en/DeviceDoc/25080A.pdf, ComponentLink4Description="Product URL", ComponentLink4URL=http://www.microchip.com/SST25VF512A, DatasheetVersion=DS25090A, Mounting Technology="Surface Mount", PackageDescription="8-Lead Plastic Small Outline, 4.9 x 3.9 mm Body, 1.27 mm Pitch", PackageReference=SOIC-SA8, PackageVersion="Rev. A", PartNumber=SST25VF512A-33-4C-SAE
U5: library part CMP-2000-07512-1, "Barometric Pressure Sensor, with Stainless Steel Cap , 1.8 to 3.6 V, -40 to 85 degC, 8-Pin SMD, RoHS, Tape and Reel", Manufacturer="TE Connectivity", Package Description="8-Pin Surface Mount Device, Body 3 x 5 mm, Pitch 1.25 mm", Datasheet URL=http://www.te.com/commerce/DocumentDelivery/DDEController?Action=showdoc&DocId=Data+Sheet%7FMS5607-02BA03%7FB2%7Fpdf%7FEnglish%7FENG_DS_MS5607-02BA03_B2.pdf%7FMS560702BA03-50, Datasheet Version=06/2017, Lead Free=LeadFree, Manufacturer URL=http://www.te.com/, Mounting Technology=SurfaceMount, Package Reference=MS560702BA03-50, RoHSCompliant=false
U6: library part CMP-2000-07467-2, "IMU ACCEL/GYRO I2C/SPI 14LGA", Manufacturer=STMicroelectronics, Max Supply Voltage=3.6V, Min Supply Voltage=1.62V, Operating Supply Current=0.29-0.65mA, Package=LGA-14L-DM00249496, Temperature="-40°C to +85°C", Temperature Range High=+85°C, Temperature Range Low=-40°C, Accel Range=2/4/8/16g, Automotive=No, Category=IC, ComponentLink2Description=Datasheet, ComponentLink2URL=https://www.st.com/resource/en/datasheet/lsm6dsl.pdf, Device Class L1=Sensors, Device Class L2="Motion Sensors", Device Class L3="Inertial Measurement Units (IMUs)", Digikey Description="IMU ACCEL/GYRO I2C/SPI 14LGA", Footprint Url=https://www.st.com/resource/en/technical_note/cd00134799.pdf, Gyro Range=125/250/500/1000/2000°/s, Height=0.86mm, Lead Free=Yes, Manufacturer Part Number=LSM6DSLTR, Mouser Description="iNEMO inertial module: always-on 3D accelerometer and 3D gyroscope", Octopart=https://octopart.com/lsm6dsltr-stmicroelectronics-66358193, Resolution=16bits, RoHS=TRUE, Sensor Output=I2C,SPI, Sensor Type=Temperature,Accelerometer,Gyroscope
U7: library part CMP-1148-00006-1, "High Precision Hall Effect Latch, PG-SC59, Reel, Green", Manufacturer=Infineon, Bhyst (25degreesC) max="4Â mT", Bop (25degreesC) min="2Â mT", Brp (25degreesC) typ="-2Â mT", Chopped Hall Technology=TRUE, ComponentLink1Description="Manufacturer URL", ComponentLink1URL=http://www.infineon.com/, ComponentLink2Description=Datasheet, ComponentLink2URL=http://www.infineon.com/dgdl/TLE4946-2K_DS_Rev1.pdf?folderId=db3a30431f848401011facc1c83b4674&fileId=db3a30431f848401011fbc925c48637f, ComponentLink3Description="Package Specification", ComponentLink3URL=http://www.infineon.com/dgdl/SC59-Package_Overview.pdf?folderId=db3a30431936bc4b01194dc0d34440b0&fileId=db3a30431936bc4b01194dd1aa1d40cf, DatasheetVersion="Rev. 1.0", Direction Detection=FALSE, Green=TRUE, Interface="open collector", Mounting Technology="Surface Mount", PackageDescription="3-Pin Semiconductor Package, 3 x 1.53 mm Body, 0.95 mm Pitch", PackageReference=PG-SC59, PackageVersion=Mar-08, Packing=Reel, PartNumber=TLE4946-2K, Target Application=Automotive, Type=Latch
Y1: library part XRCGB25M000F0L00R0, "CRYSTAL 25.0000MHZ 6PF SMD", ESR (Equivalent Series Resistance)="50 Ohm", Frequency=25MHz, Frequency Stability=±50ppm, Load Capacitance=8pF, Operating Temperature="-10°C ~ 70°C", Frequency Tolerance=±50ppm, Series=NX5032GA, Supplier 1=Digi-Key, Type="MHz Crystal"

## Free pads (board coordinates)
  round 230 hole 177.01: 2(196.85,2053.15) 3(4303.15,2053.15) 4(4303.15,196.85) C(196.85,196.85)

## Via types
v1: diameter 24, hole 12, Top Layer to Bottom Layer, 71 vias
v2: diameter 50, hole 28, Top Layer to Bottom Layer, 1 vias

## Nets (pads, with @x,y where several pads share a name; then routed paths per layer and width w, separated by ;. In a path a pad name is that pad's centre, name@x,y a point inside that pad or via, vN(x,y) a via of type N, cw(c..) or ccw(c..) an arc to the next point about the centre after c; other vN are vias at no path point)
3V3: C6.2 C8.A C9.2 C16.1 C17.1 C19.2 D8.3 J2.1 L1.1 L2.2 L3.1 L4.1 L5.1 L6.1 L7.1 R2.1 R5.1 R6.1 R8.2 R12.1 R16.1 R20.1 U1.1 U2.5 U3.5 | length 4818.6
  Top Layer w6.79: R8.2@290,1384.61 292.95,1384.61 337.56,1340 C6.2@366.24,1340 ; R2.1@342.79,1081.9 342.79,1125.29 336.24,1131.84 336.24,1205.53 358.11,1227.4 U2.5@371.36,1227.4 C6.2@371.36,1329 ; C6.2@366.24,1342.78 C6.2@370,1342.78 ; C6.2@370,1340 373.76,1336.24 373.76,1329 381.99,1329 422.3,1288.69 v1(422.3,1285.38) ; L5.1@532.19,107.8 546.95,107.8 560.29,94.46 560.29,93.98 574.15,80.12 663.98,80.12 v1(672.24,71.85) ; C8.A@1374.02,1263.78 C8.A@1411.42,1263.78 ; v1(1618.11,837.6) 1668.81,837.6 1712.36,881.15 L3.1@1714.81,881.15 ; v1(1622.05,1171.61) 1622.05,1192.91 ; L1.1@1770.13,1208.06 1765.95,1212.23 1751.26,1212.23 1731.94,1192.91 1622.05,1192.91 ; U3.5@1824.76,2120 1088.19,2120 L2.2@778.19,1810 923.19,1665 1490.6,1665 1511.81,1643.79 C17.1@1511.81,1637.8 1507.87,1633.86 C16.1@1507.87,1503.94 1507.87,1360.24 C8.A@1411.42,1263.78 ; 1908.55,678.98 1908.55,518.1 1935,491.64 v1(1935,490) ; U1.1@2192.5,1380.29 2159.29,1413.51 2159.29,1419.13 2192.91,1452.76 v1(2244.09,1452.76) ; L4.1@2332.03,1640.11 2340.21,1640.11 2397.64,1582.68 2560.67,1582.68 R5.1@2583.48,1559.86 ; v1(2485.24,482.28) 2487.74,482.28 2511.36,458.66 L7.1@2574.8,458.66 ; v1(3211.61,1208.66) 3211.61,1266.1 R16.1@3215,1269.49 ; R20.1@3670,1350.51 3674.02,1354.53 v1(3674.02,1426.77) ; R12.1@3986.57,270 3988.86,267.72 v1(4076.77,267.72) ; D8.3@4074.8,1102.36 4076.44,1104 4113.52,1104 v1(4115.16,1105.64) ; C8.A@1411.42,1263.78 1462.05,1213.14 1477.8,1213.14 C9.2@1496.06,1194.88 1498.03,1192.91 1622.05,1192.91
  Top Layer w10: C19.2@1913.5,365.08 1967.99,310.59 1967.99,298.78 L6.1@1976.77,290 ; C19.2@1913.5,370 1913.5,374.92 1920.31,381.73 1925.23,381.73 1935,391.5 v1(1935,490)
  other v1: 2492.13,1582.68
3V3_IMU: C20.2 C21.2 L6.2 R24.1 R25.1 U6.5 U6.8 | length 1237.8
  Top Layer w6.79: R25.1@1439.38,265 1439.38,170.62 1440,170 1440,140 1529.8,50.2 1833.62,50.2 1908.5,125.08 C21.2@1908.5,210 ; U6.8@1739.53,290.77 1739.53,295.2 1743.02,298.69 1747.45,298.69 1776.52,327.76 1844.49,327.76 1850.39,321.85 1872.5,299.75 1872.5,228.99 1876.17,225.31 ; U6.5@1745.93,225.31 1876.17,225.31 ; L6.2@1900,290 1906.61,283.39 1906.61,216.81 1908.5,214.92 C21.2@1908.5,210 ; 1876.17,225.31 1890.49,211 1907.5,211 C21.2@1908.5,210
3V3_MCU: C12.1 C13.1 C14.1 C15.1 L3.2 L4.2 U1.19 U1.32 U1.48 U1.64 | length 3287.9
  Top Layer w6.79: v1(1870.08,980.31) 1869.99,980.4 1814.07,980.4 L3.2@1787.2,953.53 1805.5,953.53 C12.1@1855.49,903.54 1858.97,900.06 1870.88,900.06 1873.54,902.72 1873.83,902.72 U1.19@2011.55,1040.44 ; U1.32@2192.5,859.71 2192.5,857.39 2150,814.89 2150,798.82 2262.2,686.61 2262.2,653.43 C13.1@2265.68,649.95 2295.34,620.3 2295.34,570.58 2273.69,548.93 v1(2271.42,548.93) ; L4.2@2259.65,1567.73 2259.65,1564.15 2367.1,1456.69 v1@2373.26,1456.69 ; U1.64@2295.5,1380.29 2296.86,1380.29 v1@2373.26,1456.69 ; v1(2377.95,1456.69) v1@2373.26,1456.69 ; U1.48@2504.29,1068.5 2505.65,1068.5 2539.15,1035 2617.68,1035 2665.35,1082.68 2665.35,1091.53 2688.58,1114.76 2688.58,1153.15 v1(2692.91,1157.48)
  Bottom Layer w6.79: v1(2271.42,548.93) 2271.42,553.59 2260,565.01 2260,573.68 1870.62,963.06 1870.62,979.77 v1(1870.08,980.31) 2043.31,1153.54 2688.98,1153.54 v1(2692.91,1157.48) 2685.04,1157.48 2385.83,1456.69 v1(2377.95,1456.69)
BOOT0: R5.2 R10.2 U1.60 | length 309
  Top Layer w6.79: U1.60@2351.18,1324.62 2428.48,1401.92 R10.2@2430.03,1401.92 2432.12,1399.83 2470.5,1399.83 2511.57,1440.9 2511.57,1468.74 2548.71,1505.89 2548.71,1522.15 R5.2@2547.24,1523.62
BOOT1: R6.2 R9.2 U1.28 | length 317.9
  Top Layer w6.79: R6.2@1962.91,707.12 1961.44,708.59 1961.44,724.85 1962.91,726.32 1962.91,747.08 1994.62,778.79 2032.14,778.79 2034.23,780.88 2051.7,780.88 R9.2@2053.79,778.79 2095,820 2095,873.56 U1.28@2136.82,915.38
BST: C11.2 U3.1 | length 119.5
  Top Layer w6.79: C11.2@1944.96,1880 1945.75,1880 2015,1949.25 U3.1@2015,1970